# Altium PCB H-bridge 2.0.PcbDoc
Units mm, origin at the board's own origin, x right, y up, seen from the top; angles counter-clockwise.
Board outline 95.25 x 45.34 mm, 2 copper layers (Top Layer, Bottom Layer); 27 components, 36 nets, 97 pads, 6 vias.
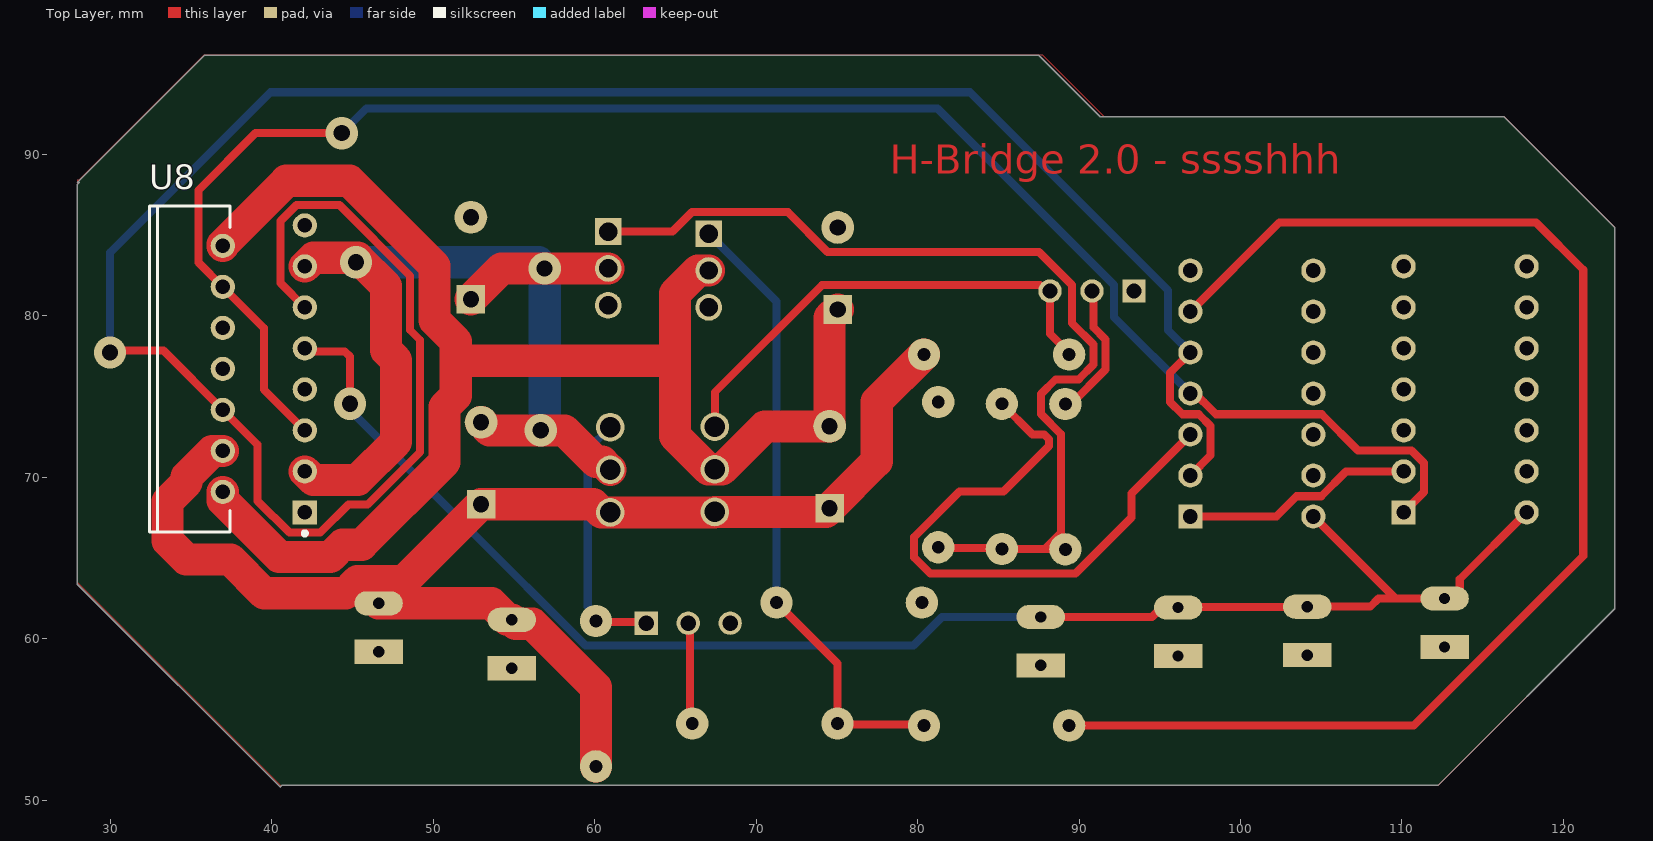
[diagram p0: Top Layer view]
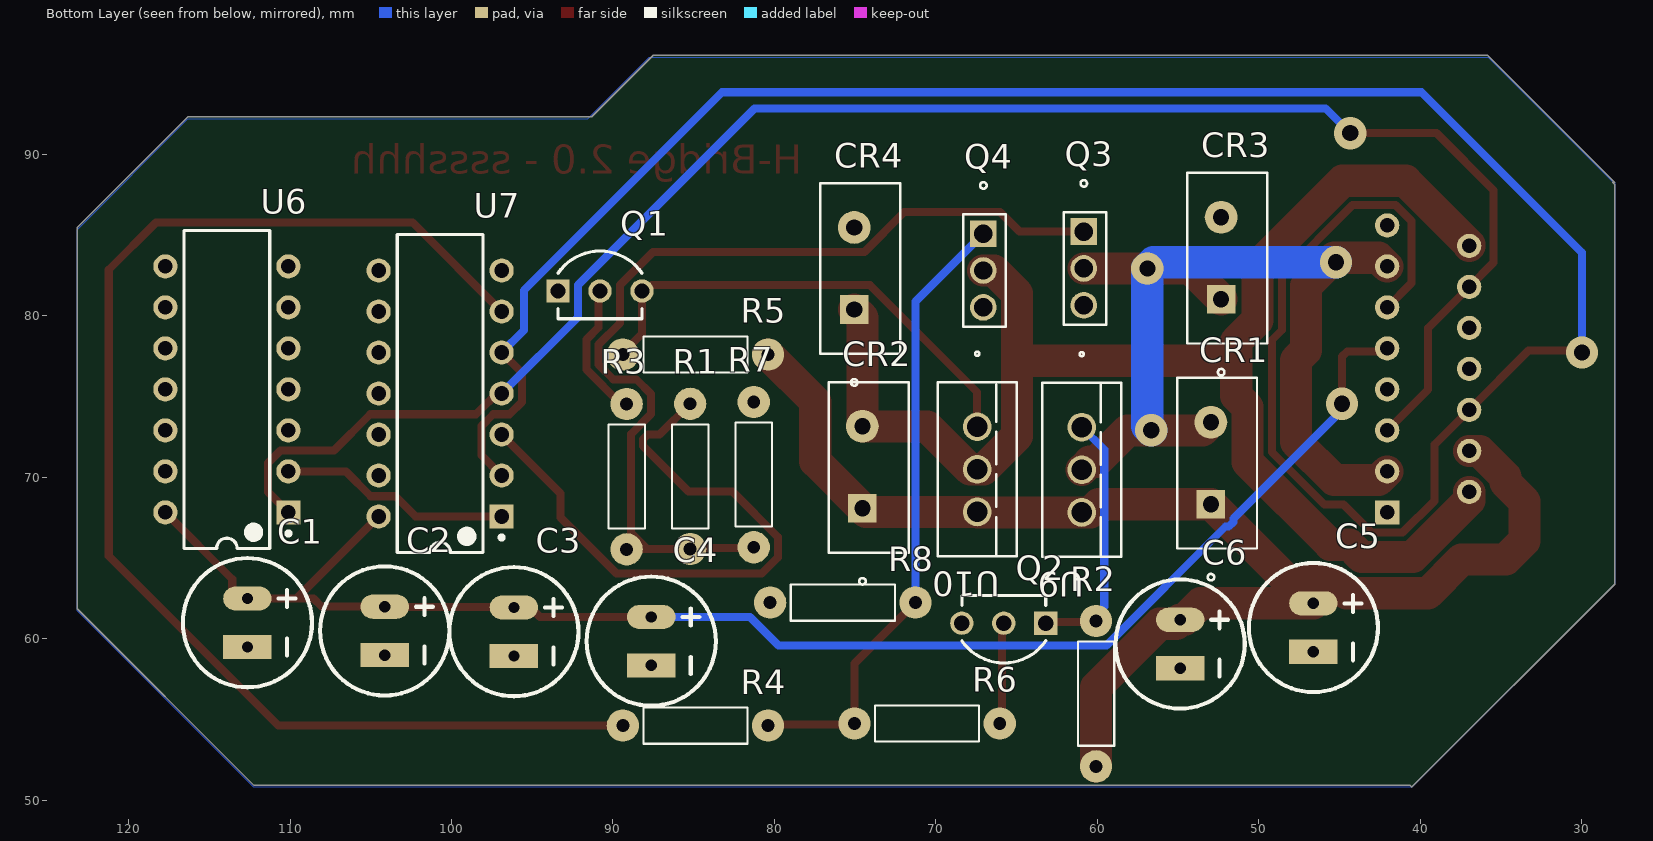
[diagram p1: Bottom Layer view, seen from below]
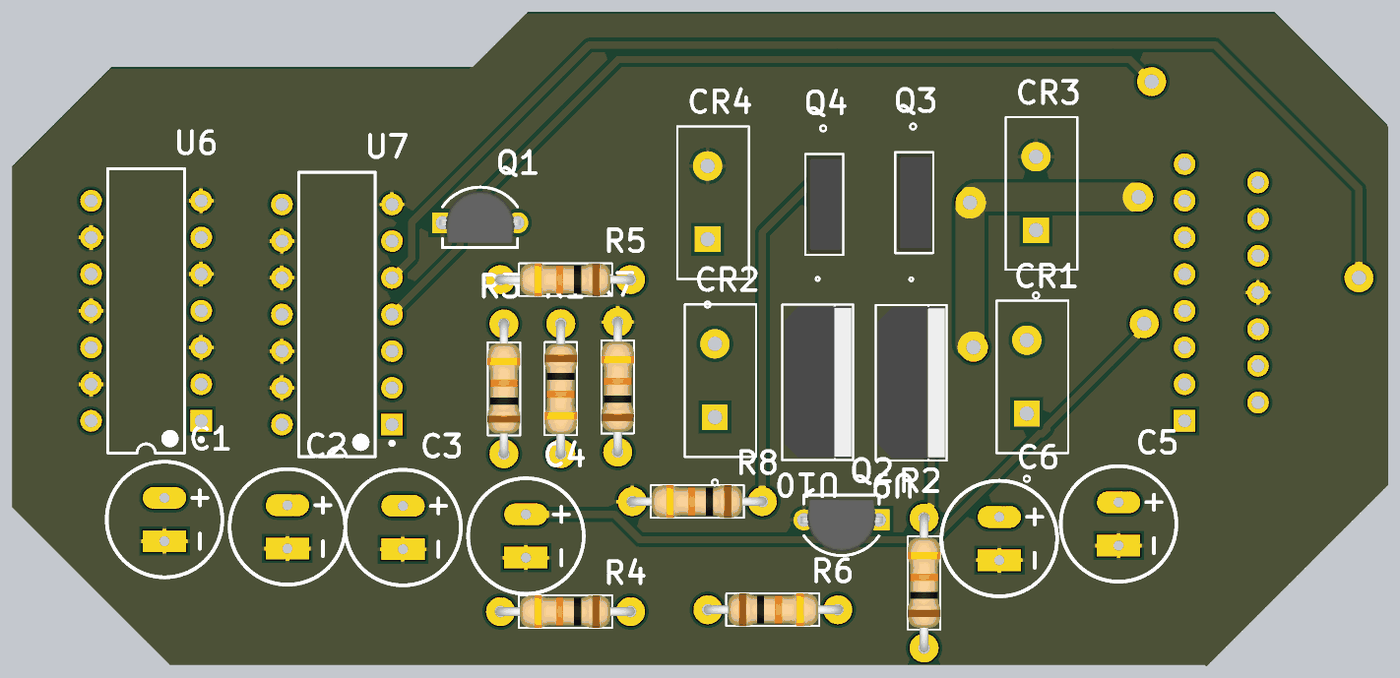
[diagram p2: 3D render of the assembled board from below, using the file's embedded part models]

## Layer stack, top to bottom
Top Solder: solder mask 0.0102, Solder Resist, Dk 3.5
Top Layer: signal copper 0.0356
Dielectric 1: dielectric 0.32, FR-4, Dk 4.8
Bottom Layer: signal copper 0.0356
Bottom Solder: solder mask 0.0102, Solder Resist, Dk 3.5

## Board outline
28.067,88.265 27.94,88.138 27.94,63.373 40.513,50.8 40.64,50.927 112.268,50.927 123.19,61.849 123.19,85.471 116.332,92.329 91.313,92.329 87.503,96.139 35.814,96.139 27.94,88.265

## Design rules (kind name [scope] priority, off if disabled: settings)
Clearance [All] p1: gap=0.254 ignorepadtopadclearanceinfootprint=FALSE
PolygonConnect [All] p1: connectstyle=Relief reliefconductorwidth=0.254 reliefentries=4 polygonreliefangle="90 Angle" airgapwidth=0.254
RoutingVias [All] p1: holewidth=0.711 width=1.27 viastyle="Through Hole" minholewidth=0.711 minwidth=1.27 maxholewidth=0.711 maxwidth=1.27
SolderMaskExpansion [All] p1: expansion=0.102 istentingtop=FALSE
SupplyNets "Schematic Supply Nets_2" [InNet('+5')] p1: voltage=0.000
SupplyNets "Schematic Supply Nets_1" [InNet('GND')] p2: voltage=0.000
SupplyNets "Schematic Supply Nets" [InNet('+12')] p3: voltage=0.000
Width [All] p1: maxlimit=3 minlimit=0.5 preferedwidth=0.5 minimp=50.000000 maximp=50.000000 favimp=50.000000
30 further rules are at their usual default settings.

## Classes and differential pairs
component class "Schematic 1.0": J1 J2 J3 J4 J5 J6 P1 P2 U1 U2 U3 U4 U5

## Components (designator, comment, footprint, x,y, rotation, side; value= is the part's Value field where it differs from the comment)
C1 "Cap" "Cap Lyt Ø8" 112.649,62.484 r270 bottom value=1uF
C2 "Cap" "Cap Lyt Ø8" 104.14,61.976 r270 bottom value=100nF
C3 "Cap" "Cap Lyt Ø8" 96.139,61.928 r270 bottom value=1uF
C4 "Cap" "Cap Lyt Ø8" 87.63,61.341 r270 bottom value=100nF
C5 "Cap" "Cap Lyt Ø8" 46.609,62.182 r270 bottom value=100uF
C6 "Cap" "Cap Lyt Ø8" 54.864,61.166 r270 bottom value=1uF
CR1 "BYV29-400" SOD59_WEN 52.959,68.326 r90 bottom
CR2 "BYV29-400" SOD59_WEN 74.549,68.072 r90 bottom
CR3 "BYV29-400" SOD59_WEN 52.324,81.026 r90 bottom
CR4 "BYV29-400" SOD59_WEN 75.057,80.391 r90 bottom
Q1 "BC546CTA" FP-135AR-MFG 90.805,81.915 r90 bottom
Q2 "BC546CTA" FP-135AR-MFG 65.786,60.58 r270 bottom
Q3 "IRLU024NPBF" PG-TO251-3-901_INF 60.833,85.217 r270 bottom
Q4 "IRLU024NPBF" PG-TO251-3-901_INF 67.056,85.09 r270 bottom
R1 "Resistor" "RES THT 9mm" 85.217,65.549 r90 bottom value=100
R2 "Resistor" "RES THT 9mm" 60.071,61.087 r270 bottom value=10K
R3 "Resistor" "RES THT 9mm" 89.154,74.532 r270 bottom value=10K
R4 "Resistor" "RES THT 9mm" 89.391,54.61 r180 bottom value=100
R5 "Resistor" "RES THT 9mm" 89.391,77.597 r180 bottom value=10K
R6 "Resistor" "RES THT 9mm" 66.04,54.737 r0 bottom value=10K
R7 "Resistor" "RES THT 9mm" 81.28,74.659 r270 bottom value=10K
R8 "Resistor" "RES THT 9mm" 80.264,62.23 r180 bottom value=10K
U6 "SN74HC04N" N0014A 113.919,75.438 r0 bottom
U7 "SN74HC08N" N0014A 100.711,75.184 r0 bottom
U8 "L298N" STM-FM-15 39.497,76.708 r180 top
U9 "IRF9530PBF" TO220AB_VIS 60.96,73.098 r270 bottom
U10 "IRF9530PBF" TO220AB_VIS 67.437,73.125 r270 bottom

## Footprints (in the part's own frame and the unit in brackets; to place one, negate y for a bottom-side part, rotate by r counter-clockwise, add the part's x,y. Pads: shape width x height; smd on the part's side, far side on the other; paste and mask are expansions set on the pad)
"Cap Lyt Ø8" [mm] "Capacitor"
  oval 1.5x3 hole 0.7: 1(0,0)
  rect 1.5x3 hole 0.7: 2(3,0)
  silkscreen extent -2.5,-4 5.5,4
FP-135AR-MFG [mm]
  rect 1.45x1.45 hole 0.95 paste-2539.97 mask+0: 1(-0.38,2.6)
  round 1.45 hole 0.95 paste-2539.97 mask+0: 2(-0.38,0) 3(-0.38,-2.6)
  silkscreen extent -2.09,-2.6 2.09,2.6, body extent -1.79,-2.83 1.83,2.83, height 8.77
N0014A [mm] "DIP, 14-Leads, Body 19.7x6.6mm, Pitch 2.54mm"
  rect 1.5x1.5 hole 0.9: 1(-3.81,7.62)
  round 1.5 hole 0.9: 2(-3.81,5.08) 3(-3.81,2.54) 4(-3.81,0) 5(-3.81,-2.54) 6(-3.81,-5.08) 7(-3.81,-7.62) 8(3.81,-7.62) 9(3.81,-5.08) 10(3.81,-2.54) 11(3.81,0) 12(3.81,2.54) 13(3.81,5.08) 14(3.81,7.62)
  silkscreen extent -3.93,-9.85 2.65,9.85, body extent -3.95,-9.85 3.95,9.85, height 5.08
PG-TO251-3-901_INF [mil]
  rect 65x65 / inner round 60 / far side rect 65x65 hole 45 paste-99999 mask+0: 1(0,0)
  round 65 / inner round 60 / far side round 65 hole 45 paste-99999 mask+0: 2(90,0) 3(180,0)
  silkscreen extent -125,-49 228,55, body extent -43,-44 222,50, height 384
"RES THT 9mm" [mm]
  round 2 hole 0.8: 1(0,0) 2(9,0)
  silkscreen extent 1.28,-1.12 7.73,1.12, body extent -0.32,-1.13 9.28,1.13, height 2.36
SOD59_WEN [mil]
  rect 70x70 / inner round 60 / far side rect 70x70 hole 39.37 paste-99999 mask+0: 1(0,0)
  round 80 / inner round 60 / far side round 80 hole 39.37 paste-99999 mask+0: 2(200,0)
  silkscreen extent -186,-113 308,82
STM-FM-15 [mm] "FM, 15-Leads, Body 20.2x5mm, Pitch 1.27mm"
  rect 1.5x1.5 hole 0.9: 1(-2.54,8.89)
  round 1.5 hole 0.9: 2(2.54,7.62) 3(-2.54,6.35) 4(2.54,5.08) 5(-2.54,3.81) 6(2.54,2.54) 7(-2.54,1.27) 8(2.54,0) 9(-2.54,-1.27) 10(2.54,-2.54) 11(-2.54,-3.81) 12(2.54,-5.08) 13(-2.54,-6.35) 14(2.54,-7.62) 15(-2.54,-8.89)
  silkscreen extent -2.67,-10.1 7.09,10.31, body extent -2.8,-10.1 7.09,10.1, height 21
TO220AB_VIS [mil]
  round 70 / inner round 60 / far side round 70 hole 50 paste-99999 mask+0: 1(0,0) 2(103.94,0) 3(207.87,0)
  silkscreen extent -183,-97 316,97, body extent -103,-91 311,91, height 600

## Part data
C1 C2 C3 C4 C5 C6: library part "Capacitor electrolytic"
CR1 CR2 CR3 CR4: library part BYV29-500, "No Description Available", Manufacturer_Name="WeEN Semiconductors", Copyright="Copyright (C) 2025 Ultra Librarian. All rights reserved.", Manufacturer_Part_Number=BYV29-500
Q1 Q2: library part CMP-00278-84408942-1, "BC546CTA Small Signal Bipolar Transistor, 0.1A I(C), 65V V(BR)CEO, 1-Element, NPN, Silicon, TO-92", Case/Package=TO-92-3, Collector Base Voltage (VCBO)=80V, Collector Emitter Breakdown Voltage=65V, Collector Emitter Saturation Voltage=250mV, Current Rating=100mA, Emitter Base Voltage (VEBO)=6V, Frequency=300MHz, Manufacturer Lifecycle Status=ACTIVE, Max Junction Temperature (Tj)=150°C, Max Power Dissipation=500mW, Min Operating Temperature=-65°C, Collector Emitter Voltage (VCEO)=65V, Contact Plating=Tin, Element Configuration=Single, Gain Bandwidth Product=300MHz, Height=4.58mm, hFE Min=110, Lead Free="Lead Free", Length=4.58mm, Lifecycle Status=Production, Max Breakdown Voltage=65V, Max Collector Current=100mA, Max Frequency=300MHz, Max Operating Temperature=150°C, Mount="Through Hole", NexarPartId=84408942, Number of Elements=1, Number of Pins=3, Polarity=NPN, Power Dissipation=500mW, Radiation Hardening=No, RoHS=Compliant, Schedule B="8541210080, 8541210080", Transition Frequency=300MHz, Voltage Rating (DC)=65V, Weight=240mg, Width=3.86mm
Q3 Q4: "The IR MOSFET family of power MOSFETs utilizes proven silicon processes offering designers a wide portfolio of devices to support various applications such as DC motors, inverters, SMPS, lighting, load switches as well as battery powered applications.The devices are available in a variety of surface mount and through-hole packages with industry standard footprints for ease of design.", Manufacturer_Name=Infineon, Copyright="Copyright (C) 2025 Ultra Librarian. All rights reserved.", Datasheet=https://www.infineon.com/dgdl/irlr024npbf.pdf?fileId=5546d462533600a4015356694f7f265d, Manufacturer_Part_Number=IRLU024NPBF
U6: library part CMP-1615-00892-2, "Hex Inverters, N0014A, TUBE", F @ Nom Voltage(Max)(Mhz)=20, Generic Part Number=SN74HC04, ICC @ Nom Voltage(Max)(mA)=0.02, Manufacturer="Texas Instruments", Operating Temperature Range(C)="-40 to 85", Rating=Catalog, Voltage(Nom)(V)=5, Bits(#)=6, Code_JEDEC=MS-001, DatasheetVersion=SCLS078F, Input Type=CMOS, Output Drive (IOL/IOH)(Max)(mA)=-4/4, Output Type=CMOS, PackageReference=N0014A, Schmitt Trigger=No, Technology Family=HC, tpd @ Nom Voltage(Max)(ns)=20, VCC(Max)(V)=6, VCC(Min)(V)=2
U7: library part CMP-0777-00250-3, "Quadruple 2-Input Positive-AND Gates, N0014A, TUBE", F @ Nom Voltage(Max)(Mhz)=70, Generic Part Number=SN74HC08, ICC @ Nom Voltage(Max)(mA)=0.02, Manufacturer="Texas Instruments", Operating Temperature Range(C)="-40 to 85", Rating=Catalog, tpd @ Nom Voltage(Max)(ns)=28, Voltage(Nom)(V)=5, Bits(#)=4, DatasheetVersion=SCLS081F, Input Type=CMOS, Output Type=CMOS, PackageReference=N0014A, Schmitt Trigger=No, Technology Family=HC, VCC(Max)(V)=6, VCC(Min)(V)=2
U8: library part CMP-2000-06526-1, "Dual Full-Bridge Driver, 4.8 to 46 V, -40 to 150 degC, 15-Pin FM (MW 15L), RoHS, Tube", Driver Case Style=Multiwatt, Manufacturer=STMicroelectronics, Operating Temperature Max=130°C, Operating Temperature Min=-25°C, Output Current=2A, Output Voltage=46V, Package Description="15-Pin Flange Mount, Body 5 x 19.6 mm, Pitch 1.27 mm", Package Reference=FM-15, PartNumber=L298, Supply Voltage Max=7V, Supply Voltage Min=4.5V, Automotive Qualification Standard=-, Datasheet URL=https://datasheet.ciiva.com/15109/getdatasheetpartid-50682-15109332.pdf, Datasheet Version=01/2000, Manufacturer URL=http://www.st.com/, Motor Type=FullBridge, Mounting Technology=ThroughHole, MSL=-, No. of Outputs=4Outputs, No. of Pins=15Pins, Packaging=Each, Product Range=-, SVHC=NoSVHC(17-Dec-2015)
U9 U10: "MOSFET P-CHANNEL 100V", Manufacturer_Name=Vishay, Copyright="Copyright (C) 2025 Ultra Librarian. All rights reserved.", Manufacturer_Part_Number=IRF9530PBF

## Via types
v1: diameter 2, hole 1, Top Layer to Bottom Layer, 6 vias

## Nets (pads, with @x,y where several pads share a name; then routed paths per layer and width w, separated by ;. In a path a pad name is that pad's centre, name@x,y a point inside that pad or via, vN(x,y) a via of type N, cw(c..) or ccw(c..) an arc to the next point about the centre after c; other vN are vias at no path point)
+5: C1.1 C2.1 C3.1 C4.1 U6.14 U7.14 U8.9 | length 96.4
  Top Layer w0.5: U8.9 42.227,77.787 44.514,77.787 44.831,77.47 v1(44.831,74.549) ; C4.1 94.531,61.341 95.118,61.928 C3.1 96.163,61.952 104.116,61.952 C2.1 108.045,61.976 108.553,62.484 109.601,62.484 ; U7.14 109.601,62.484 ; U6.14 113.59,63.679 113.59,62.946 113.128,62.484 C1.1 109.601,62.484
  Bottom Layer w0.5: v1(44.831,74.549) 44.831,74.168 51.566,67.433 51.566,67.228 51.861,66.933 52.066,66.933 59.416,59.583 79.744,59.583 81.502,61.341 C4.1
+12: C5.1 C6.1 CR1.1 CR2.1 R2.2 R5.2 U8.4 U9.3 U10.3 | length 86.3
  Top Layer w2: U8.4 36.309,71.628 34.703,70.022 34.703,69.668 33.528,68.493 33.528,66.069 34.7,64.897 37.431,64.897 39.522,62.806 44.552,62.806 45.306,63.56 46.863,63.56 ; C5.1 C5.1@46.613,62.182 ; R2.2 60.071,56.982 56.137,60.916 55.114,60.916 C6.1 54.614,61.166 53.598,62.182 C5.1@46.613,62.182 ; R5.2 77.47,74.676 77.47,70.993 CR2.1 74.322,67.845 U10.3 67.41,67.818 U9.3 60.412,67.818 59.904,68.326 CR1.1 48.193,63.56 46.863,63.56 ; C5.1@46.613,62.182 46.863,62.432 46.863,63.56
GND: C1.2 C2.2 C3.2 C4.2 C5.2 C6.2 CR3.2 CR4.2 Q1.1 Q2.3 Q3.3 Q4.3 R7.1 R8.1 U6.3 U6.5 U6.7 U6.9 U6.11 U6.13 U7.7 U7.9 U7.10 U7.12 U7.13 U8.8
NetCR1_2: CR1.2 CR3.1 Q3.2 U8.3 U8.13 U9.2 | length 63.2
  Top Layer w2: U8.3 42.573,69.822 45.31,69.822 47.681,72.193 47.681,72.466 47.681,77.249 47.062,77.868 47.062,81.842 45.31,83.594 42.573,83.594 U8.13 ; CR3.1 54.229,82.931 v1(56.896,82.931) Q3.2 ; CR1.2 52.968,73.406 53.476,72.898 58.129,72.898 60.072,70.955 60.463,70.955 U9.2
  Bottom Layer w2: v1(45.212,83.312) 56.515,83.312 v1(56.896,82.931) 56.896,73.154 v1(56.652,72.91)
NetCR2_2: CR2.2 CR4.1 Q4.2 U8.2 U8.14 U10.2 | length 91.8
  Top Layer w2: U8.2 36.957,68.558 40.455,65.06 43.619,65.06 44.373,65.814 45.556,65.814 50.689,70.947 50.689,74.346 51.395,75.052 51.395,77.724 51.395,78.404 50.07,79.729 50.07,83.088 44.802,88.356 40.895,88.356 36.957,84.418 U8.14 ; 51.816,77.216 64.976,77.216 ; Q4.2 66.401,82.804 64.976,81.379 64.976,77.216 ; CR4.1 74.549,79.883 CR2.2 74.543,73.146 70.534,73.146 67.873,70.485 U10.2 67.046,70.485 64.976,72.555 64.976,77.216
NetJ1_1: 
NetJ2_3: 
NetJ2_4: 
NetJ2_5: 
NetJ3_4: 
NetJ3_5: 
NetJ3_6: 
NetJ4_4: 
NetJ4_5: 
NetJ4_6: 
NetJ5_1: 
NetJ6_1: 
NetP2_1: 
NetP2_2: 
NetQ1_2: Q1.2 R3.1 | length 8.6
  Top Layer w0.5: R3.1 89.519,74.532 91.649,76.662 91.649,78.532 90.895,79.286 90.895,81.445 Q1.2
NetQ1_3: Q1.3 R5.1 U10.1 | length 30.2
  Top Layer w0.5: U10.1 67.437,75.262 74.07,81.895 87.588,81.895 87.948,81.535 Q1.3 88.205,78.886 89.391,77.7 R5.1
NetQ2_1: Q2.1 R2.1 U9.1 | length 16
  Top Layer w0.5: R2.1 60.134,61.023 63.123,61.023 Q2.1
  Bottom Layer w0.5: R2.1 60.071,61.493 59.567,61.997 59.567,71.705 U9.1
NetQ2_2: Q2.2 R6.1 | length 6.3
  Top Layer w0.5: Q2.2 65.913,60.833 65.913,54.864 R6.1
NetQ3_1: Q3.1 R1.1 R3.2 R7.2 | length 59.1
  Top Layer w0.5: Q3.1 64.819,85.217 66.022,86.419 71.959,86.419 74.427,83.951 87.527,83.951 89.576,81.902 89.576,79.539 90.895,78.22 90.895,76.974 89.985,76.064 88.56,76.064 87.65,75.155 87.65,73.909 88.896,72.663 88.896,66.552 87.884,65.541 ; R7.2 81.335,65.604 85.162,65.604 R1.1 85.225,65.541 87.884,65.541 ; R3.2 89.145,65.541 87.884,65.541
NetQ4_1: Q4.1 R4.2 R6.2 R8.2 | length 39.1
  Top Layer w0.5: R8.2 75.04,58.454 R6.2 75.103,54.673 80.328,54.673 R4.2
  Bottom Layer w0.5: Q4.1 71.264,80.882 R8.2
NetR1_2: R1.2 U7.3 | length 38.2
  Top Layer w0.5: R1.2 87.122,72.644 87.849,72.644 88.142,72.351 88.142,71.937 85.314,69.109 82.603,69.109 79.776,66.282 79.776,65.036 80.784,64.028 89.777,64.028 93.243,67.494 93.243,68.986 U7.3
NetR4_1: R4.1 U7.6 | length 81.8
  Top Layer w0.5: R4.1 110.738,54.61 121.238,65.11 121.238,82.851 118.317,85.772 102.409,85.772 U7.6
NetU2_5: 
NetU2_6: 
NetU2_7: 
NetU3_J1_18: 
NetU3_J1_19: 
NetU3_J1_20: 
NetU6_1: U6.1 U7.4 U8.5 U8.12 | length 109.5
  Top Layer w0.5: U8.5 39.497,75.438 39.497,79.248 U8.12 35.453,83.292 35.453,87.777 38.989,91.313 v1(44.323,91.313) ; U7.4 97.172,75.184 97.704,74.652 97.733,74.652 98.487,73.898 105.04,73.898 107.294,71.644 110.596,71.644 111.363,70.877 111.363,69.072 U6.1
  Bottom Layer w0.5: v1(44.323,91.313) 45.847,92.837 81.241,92.837 92.176,81.902 92.176,79.909 U7.4
NetU6_2: U6.2 U7.1 | length 14.4
  Top Layer w0.5: U7.1 102.223,67.564 103.477,68.818 105.008,68.818 106.548,70.358 U6.2
NetU7_2: U7.2 U7.5 U8.6 U8.11 | length 151.1
  Top Layer w0.5: v1(29.972,77.724) 30.099,77.851 33.274,77.851 U8.6 39.113,72.012 39.113,68.529 41.078,66.564 42.996,66.564 44.75,68.318 45.933,68.318 49.185,71.57 49.185,78.487 48.566,79.106 48.566,82.465 44.179,86.852 41.518,86.852 40.533,85.867 40.533,82.022 U8.11 ; U7.2 98.155,71.358 98.155,73.163 97.42,73.898 96.414,73.898 95.647,74.665 95.647,76.47 U7.5
  Bottom Layer w0.5: v1(29.972,77.724) 29.972,83.907 39.914,93.849 83.254,93.849 95.524,81.579 95.524,79.101 U7.5
pads on no net: U6.4 U6.6 U6.8 U6.10 U6.12 U7.8 U7.11 U8.1 U8.7 U8.10 U8.15

## Polygon pours and split planes (outlines as drawn)
GND on Bottom Layer "NONET_L02_P001" (solid, shelved, pour order 1): 35.761,96.005 28.021,88.265 27.94,88.265 27.94,63.373 40.513,50.8 112.268,50.8 123.19,61.722 123.19,85.344 116.332,92.202 91.567,92.202 87.757,96.012 36.068,96.012
GND on Top Layer "NONET_L01_P000" (solid, shelved, pour order 0): 35.761,96.132 28.021,88.392 27.94,88.392 27.94,63.5 40.513,50.927 112.268,50.927 123.19,61.849 123.19,85.471 116.332,92.329 91.567,92.329 87.757,96.139 36.068,96.139

## Other copper
Top Layer:
  text "H-Bridge 2.0 - sssshhh" at 78.278,88.784 h1.8

## Text inside footprints (layer, text, board x,y; h text height)
U9: Mechanical 13 "TAB" at 59.588,70.934 h0.64 r90
U10: Mechanical 13 "TAB" at 66.065,70.961 h0.64 r90